# EAGLE board power indicator_right (EAGLE 7.3.0)
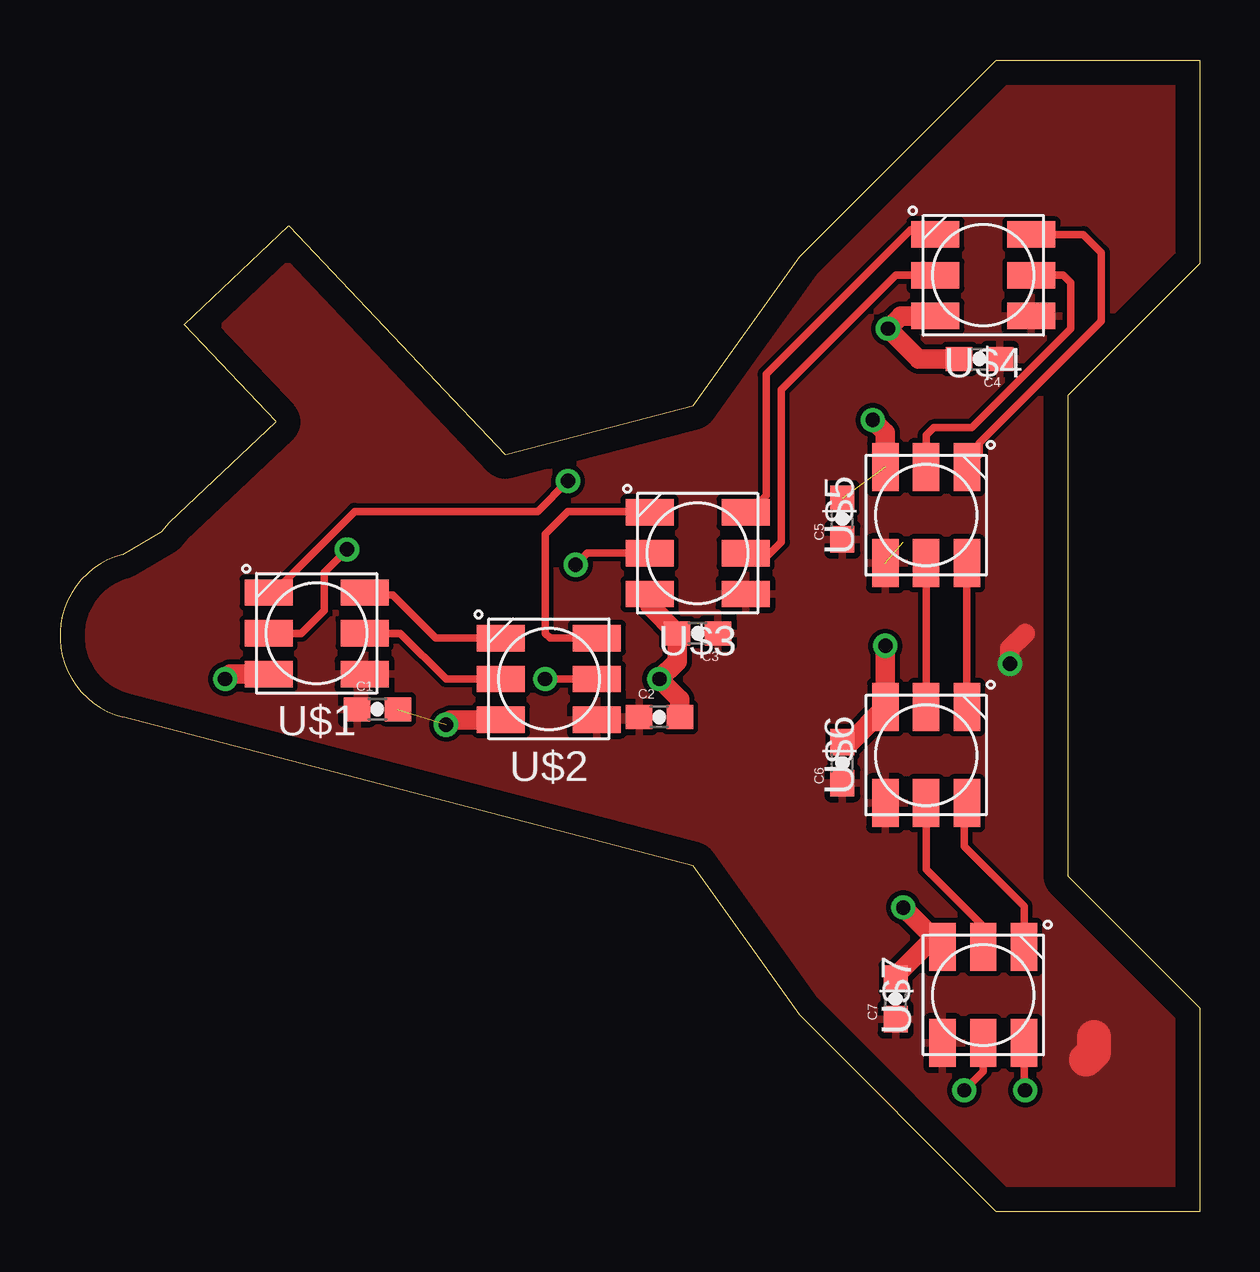
[diagram p0: board, top side]
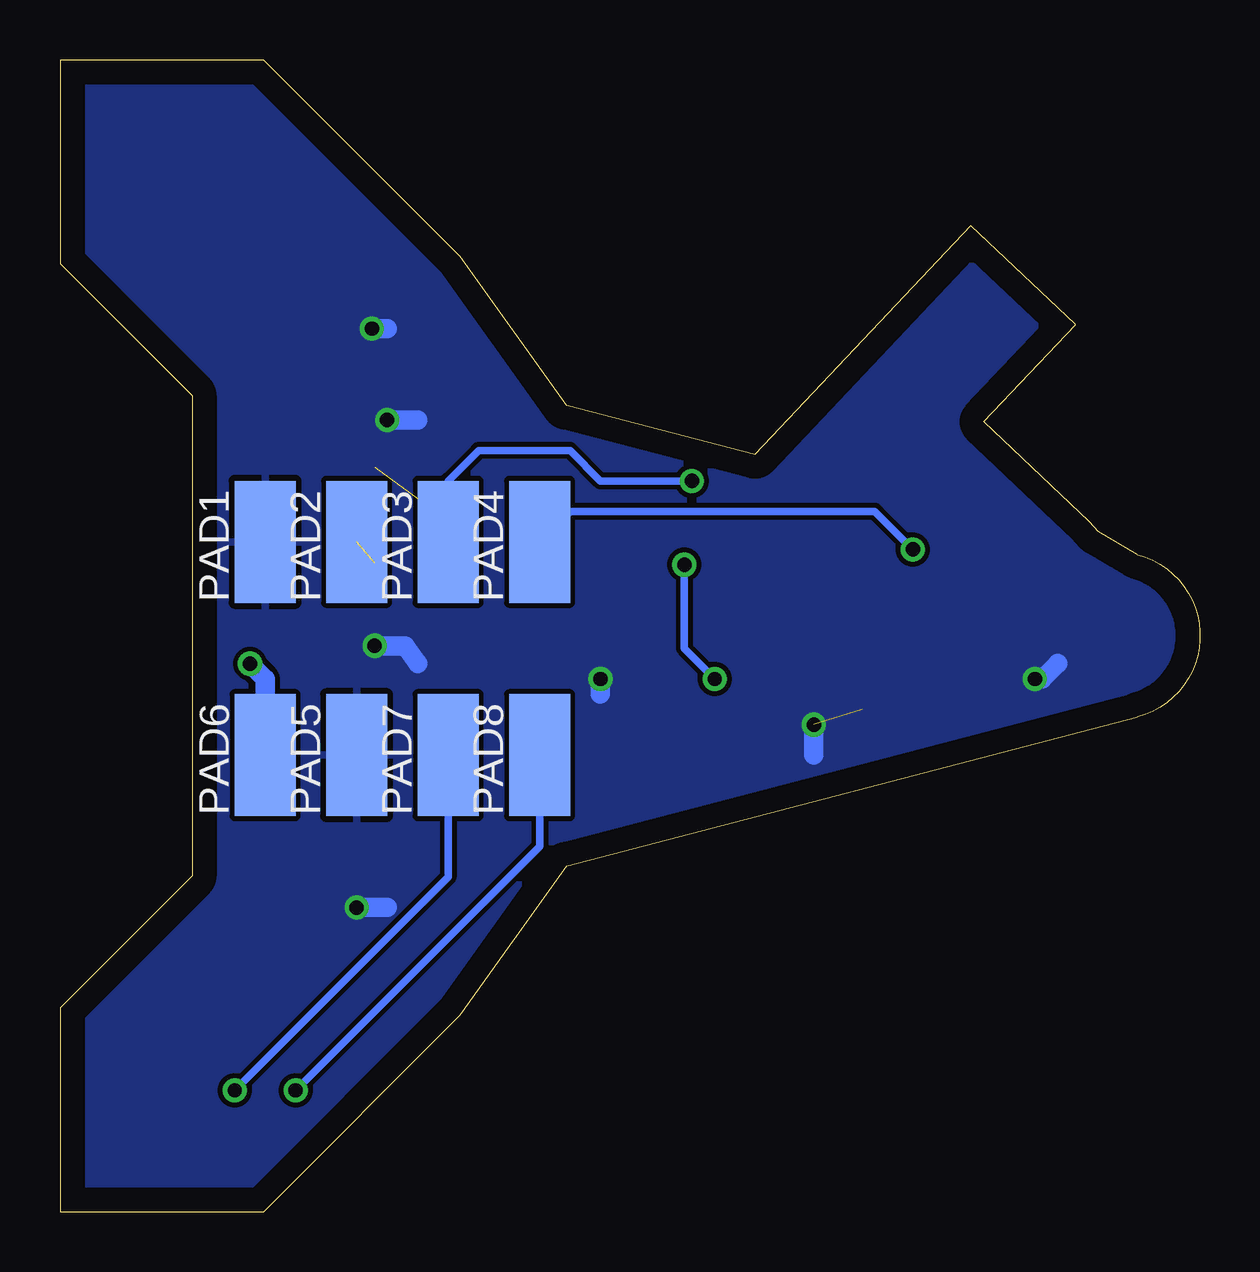
[diagram p1: board, bottom side, seen from below]

Size 47.5 x 48 mm. Coordinates in mm from the lower left corner, seen from the top.
Outline: 4.24,28.35 4.58,28.74 9.01,32.92 5.18,36.97 9.54,41.09 18.55,31.55 26.38,33.6 30.82,39.81 39.01,48 47.5,48 47.5,39.51 42,34.01 42,13.98 47.5,8.48 47.5,0 39.01,0 30.82,8.19 26.38,14.4 2.61,20.61 arc-151 2.61,27.39 4.24,28.35
Copper layers (1*16): Top 0.035mm / dielectric 1.5mm / Bottom 0.035mm
Design rules "default": minimum track width 10mil, minimum drill 24mil, track to track 8mil, track to pad 8mil, pad to pad 8mil, via to via 8mil, smd to smd 8mil, copper to edge 40mil, drill to drill 8mil, minimum pad ring 10mil, minimum via ring 8mil, stop-mask expansion 4mil, vias tented up to drill 0mil, thermal gap 10mil

## Footprints (pad centres in the part's own frame; a part is rotated, then mirrored left to right if it is on the bottom)
0603-CAP = smd 1.1 x 1: 1 -0.85,0; 2 0.85,0
SMD2,54-5,08 = smd 2.54 x 5.08: 1 0,0
APA102_5050 = smd 2 x 1.1: 1 2,-1.7; 2 2,0; 3 2,1.7; 4 -2,1.7; 5 -2,0; 6 -2,-1.7

## Placement (x,y rotation side)
C1  0.1uF  [0603-CAP]  13.23,20.93 0 top
C2  0.1uF  [0603-CAP]  24.98,20.61 0 top
C3  0.1uF  [0603-CAP]  26.56,24.1 180 top
C4  0.1uF  [0603-CAP]  38.31,35.53 180 top
C5  0.1uF  [0603-CAP]  32.6,28.87 90 top
C6  0.1uF  [0603-CAP]  32.6,18.71 90 top
C7  0.1uF  [0603-CAP]  34.82,8.86 90 top
PAD1  WIREPADSMD2,54-5,08  [SMD2,54-5,08]  38.95,27.91 0 bottom
PAD2  WIREPADSMD2,54-5,08  [SMD2,54-5,08]  35.14,27.91 0 bottom
PAD3  WIREPADSMD2,54-5,08  [SMD2,54-5,08]  31.33,27.91 0 bottom
PAD4  WIREPADSMD2,54-5,08  [SMD2,54-5,08]  27.52,27.91 0 bottom
PAD5  WIREPADSMD2,54-5,08  [SMD2,54-5,08]  35.14,19.02 0 bottom
PAD6  WIREPADSMD2,54-5,08  [SMD2,54-5,08]  38.95,19.02 0 bottom
PAD7  WIREPADSMD2,54-5,08  [SMD2,54-5,08]  31.33,19.02 0 bottom
PAD8  WIREPADSMD2,54-5,08  [SMD2,54-5,08]  27.52,19.02 0 bottom
U$1  APA1025050  [APA102_5050]  10.69,24.1 0 top
U$2  APA1025050  [APA102_5050]  20.37,22.2 0 top
U$3  APA1025050  [APA102_5050]  26.56,27.44 0 top
U$4  APA1025050  [APA102_5050]  38.47,39.03 0 top
U$5  APA1025050  [APA102_5050]  36.09,29.03 270 top
U$6  APA1025050  [APA102_5050]  36.09,19.02 270 top
U$7  APA1025050  [APA102_5050]  38.47,9.02 270 top

## Library data of the parts
C1-C7 = SparkFun-Capacitors; PROD_ID: CAP-08390
PAD1-PAD8 = wirepad
U$1-U$7 = jos-ph

## Nets
+5V: C1.1 C2.1 C3.1 C4.1 C5.1 C6.1 C7.1 PAD2.1 PAD6.1 U$1.1 U$2.1 U$3.1 U$4.1 U$5.1 U$6.1 U$7.1
GND: C1.2 C2.2 C3.2 C4.2 C5.2 C6.2 C7.2 PAD1.1 PAD5.1 U$1.6 U$2.6 U$3.6 U$4.6 U$5.6 U$6.6 U$7.6
N$1: U$1.2 U$2.5
N$2: U$1.3 U$2.4
N$3: U$2.2 U$3.5
N$4: U$2.3 U$3.4
N$5: U$3.2 U$4.5
N$6: U$3.3 U$4.4
N$7: U$4.2 U$5.5
N$8: U$4.3 U$5.4
N$9: U$5.2 U$6.5
N$10: U$5.3 U$6.4
N$11: U$6.2 U$7.5
N$12: U$6.3 U$7.4
N$13: PAD8.1 U$7.2
N$14: PAD7.1 U$7.3
N$15: PAD3.1 U$1.4
N$16: PAD4.1 U$1.5

## Tracks (layer width: path | path; a pad name or v marks a point on that pad's centre or on a via)
+5V  (via drill 0.6)  (1 unrouted)
  Top 0.813: v39.58,22.83 39.58,23.47 40.22,24.1
  Top 1.422: 43.07,7.28 43.07,6.64 42.76,6.32
  Bottom 0.813: PAD6.1 38.95,22.2 v39.58,22.83
  pour Top: -1.95,50.27 -1.95,14.2 37.68,-2.06 51.9,-2.06 50.88,53.06 -1.95,50.52
GND  (via drill 0.6)  (2 unrouted)
  Top 0.813: U$1.6 7.08,22.4 v6.88,22.2 | U$2.6 16.29,20.5 v16.09,20.29 | U$4.6 35.02,37.33 v34.5,36.8 35.77,35.53 C4.2 | C2.2 25.83,21.35 v24.98,22.2 25.71,22.94 C3.2 24.56,25.25 U$3.6 | U$5.6 34.39,32.47 v33.87,32.99 | U$7.6 36.77,11.04 36.41,11.4 | 36.41,11.4 v35.14,12.67 | C7.2 34.82,9.82 36.41,11.4 | C6.2 32.92,19.56 U$6.6 v34.39,23.58
  Bottom 0.813: v6.88,22.2 6.56,22.2 5.93,22.83 | v16.09,20.29 16.09,19.02 | v34.5,36.8 33.87,36.8 | v24.98,22.2 24.98,21.56 | v33.87,32.99 32.6,32.99 | v35.14,12.67 33.87,12.67 | v34.39,23.58 33.12,23.58 32.6,22.83
  pour Bottom: -1.95,50.52 -1.95,14.2 37.68,-2.06 51.9,-2.06 50.88,53.06
N$1
  Top 0.305: U$2.5 16.09,22.2 14.18,24.1 U$1.2
N$2
  Top 0.305: U$2.4 15.66,23.9 13.86,25.69 12.8,25.69 U$1.3
N$3  (via drill 0.6)
  Top 0.305: U$3.5 21.96,27.44 v21.48,26.96 | v20.21,22.2 U$2.2
  Bottom 0.305: v21.48,26.96 21.48,23.47 v20.21,22.2
N$4
  Top 0.305: 23.71,29.18 24.36,29.18 U$3.4 24.52,29.18 21.17,29.18 20.21,28.23 20.21,24.1 20.42,23.9 U$2.3
N$5
  Top 0.305: U$3.2 29.42,27.28 30.06,27.91 30.06,34.26 34.82,39.03 U$4.5 36.31,38.71
N$6
  Top 0.305: U$4.4 36.42,40.93 35.45,40.93 29.42,34.9 29.42,29.84 U$3.3
N$7
  Top 0.305: U$4.2 41.8,39.03 42.12,38.71 42.12,36.8 37.99,32.68 36.41,32.68 36.09,32.36 U$5.5 | U$5.5 36.09,30.77 36.41,30.45 36.41,30.71 U$5.5
N$8
  Top 0.305: U$4.3 42.64,40.73 43.39,39.98 43.39,37.12 38.31,32.04 38.31,31.55 U$5.4
N$9
  Top 0.305: U$5.2 U$6.5
N$10
  Top 0.305: U$5.3 U$6.4 | U$6.4 37.79,20.41 37.68,20.29 37.68,20.91 U$6.4
N$11
  Top 0.305: U$7.5 38.47,11.88 36.09,14.26 U$6.2
N$12
  Top 0.305: U$7.4 40.17,12.72 37.68,15.21 37.68,16.91 U$6.3
N$13  (via drill 0.6)
  Top 0.305: U$7.2 38.47,5.85 v37.68,5.05
  Bottom 0.305: PAD8.1 27.52,15.21 v37.68,5.05
N$14  (via drill 0.6)
  Top 0.305: U$7.3 40.17,5.1 v40.22,5.05
  Bottom 0.305: PAD7.1 31.33,13.94 v40.22,5.05
N$15  (via drill 0.6)
  Top 0.305: U$1.4 8.9,25.8 12.28,29.18 19.9,29.18 v21.17,30.45
  Bottom 0.305: v21.17,30.45 24.98,30.45 26.25,31.72 30.06,31.72 31.33,30.45 PAD3.1
N$16  (via drill 0.6)
  Top 0.305: U$1.5 10.05,24.1 11.01,25.06 11.01,26.64 v11.96,27.6
  Bottom 0.305: v11.96,27.6 13.55,29.18 26.25,29.18 PAD4.1